# EAGLE board babylight (EAGLE 6.4)
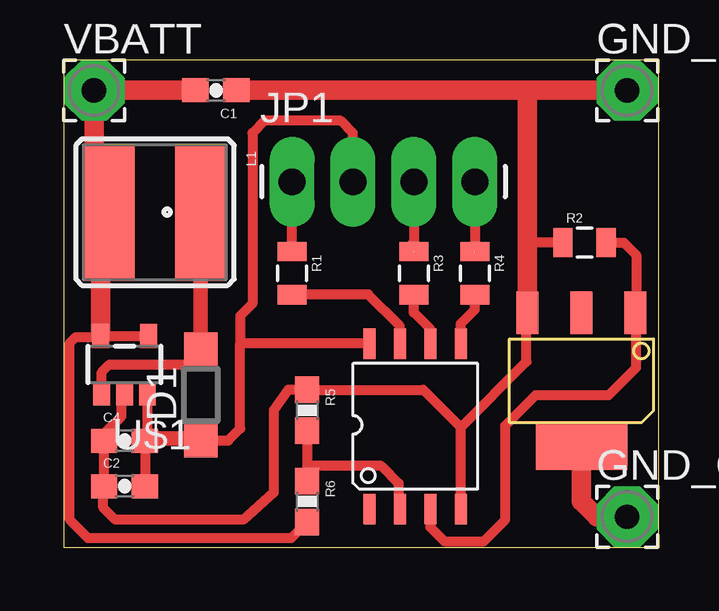
[diagram p0: board, top side]

Size 24.82 x 20.31 mm. Coordinates in mm from the lower left corner, seen from the top.
Outline: 0,0 24.82,0 24.82,20.31 0,20.31 0,0
Copper layers (1*16): Top 0.035mm / dielectric 1.5mm / Bottom 0.035mm
Design rules "default": minimum track width 10mil, minimum drill 24mil, track to track 8mil, track to pad 8mil, pad to pad 8mil, via to via 8mil, smd to smd 8mil, copper to edge 40mil, drill to drill 8mil, minimum pad ring 10mil, minimum via ring 8mil, stop-mask expansion 4mil, vias tented up to drill 0mil, thermal gap 10mil

## Footprints (pad centres in the part's own frame; a part is rotated, then mirrored left to right if it is on the bottom)
0603-CAP = smd 1.1 x 1: 1 -0.85,0; 2 0.85,0
SOD123 = smd 1.4 x 1.4: A 1.9,0; C -1.9,0
2,54/1,0 = drill 1.016 pad 2.54 octagon: 1 0,0
1X04_LONGPADS = drill 1.118 pad 1.88 long: 1 0,0; 2 2.54,0; 3 5.08,0; 4 7.62,0
CR54 = smd 5.5 x 2.15: P$1 0,1.92; P$2 0,-1.92
0805 = smd 0.8 x 1.2: 1 -0.9,0; 2 0.9,0
0603-RES = smd 1.1 x 1: 1 -0.85,0; 2 0.85,0
SOT23-5 = smd 0.7 x 1: 1 0.95,1.2; 2 0,1.2; 3 -0.95,1.2; 4 -1,-1.2; 5 1,-1.2
WSOIC-8 = smd 0.508 x 1.27: 1 -1.855,-3.486; 2 -0.585,-3.486; 3 0.685,-3.486; 4 1.955,-3.486; 5 1.955,3.413; 6 0.685,3.413; 7 -0.585,3.413; 8 -1.855,3.413
SOT-223 = smd 0.914 x 1.778: 1 -2.25,-2.8; 2 0,-2.8; 3 2.25,-2.8 | smd 3.81 x 1.93: 4 0,2.8

## Placement (x,y rotation side)
C1  22uF  [0603-CAP]  6.35,19.05 180 top
C2  22uF  [0603-CAP]  2.54,2.54 0 top
C4  1uF  [0603-CAP]  2.54,4.45 0 top
D1  MBR0520  [SOD123]  5.71,6.35 90 top
GND_IN  [2,54/1,0]  23.5,19.05 0 top
GND_OUT  [2,54/1,0]  23.5,1.27 0 top
JP1  [1X04_LONGPADS]  9.53,15.24 0 top
L1  22uH  [CR54]  3.81,13.97 270 top
R1  560  [0805]  9.53,11.43 270 top
R2  100K  [0805]  21.72,12.7 0 top
R3  270  [0805]  14.61,11.43 270 top
R4  270  [0805]  17.14,11.43 270 top
R5  150K  [0603-RES]  10.16,5.71 270 top
R6  68K  [0603-RES]  10.16,1.91 270 top
U$1  SP6641A  [SOT23-5]  2.54,7.62 180 top
U$2  ATTINY13  [WSOIC-8]  14.61,5.08 0 top
U$7  FQT13N06LTF  [SOT-223]  21.59,6.99 180 top
VBATT  [2,54/1,0]  1.27,19.05 0 top

## Library data of the parts
C1 C2 C4 L1 R1-R6 = SparkFun
D1 = diode
GND_IN GND_OUT VBATT = wirepad
JP1 = SparkFun-Connectors
U$1 = Sipex Custom
U$2 U$7 = Synapseware

## Nets
5V: C2.2 C4.2 D1.C JP1.2 U$1.3 U$2.8
BLU: JP1.4 R4.1
GND: C1.1 C2.1 C4.1 GND_IN.1 R2.1 R5.1 U$1.2 U$2.4 U$7.3
GND_OUT: GND_OUT.1 U$7.4
GRN: JP1.3 R3.1
N$1: R5.2 R6.1 U$2.2
N$3: D1.A L1.P$1 U$1.1
N$6: R4.2 U$2.5
N$7: R3.2 U$2.6
N$8: R1.2 U$2.7
RED: JP1.1 R1.1
SW: R2.2 U$2.3 U$7.1
VBATT: C1.2 L1.P$2 R6.2 U$1.4 U$1.5 VBATT.1

## Tracks (layer width: path | path; a pad name or v marks a point on that pad's centre or on a via)
5V
  Top 0.406: JP1.2 12.06,17.27 11.56,17.78 8.38,17.78 7.87,17.27 7.87,10.16 7.37,9.65 7.37,8.51 | 7.37,8.51 12.73,8.51 U$2.8 | U$1.3 3.49,4.54 C4.2 C2.2 | D1.C 6.86,4.45 7.37,4.95 7.37,8.51
  Top 0.61: 3.49,4.54 5.81,4.54 D1.C
BLU  (1 unrouted)
  Top 0.406: JP1.4 17.14,12.57 16.76,12.19 17.16,12.32
GND
  Top 0.406: U$2.4 16.56,5 | 16.56,5 19.3,7.75 19.3,9.75 U$7.3 | U$1.2 2.41,6.29 2.41,5.46 1.69,4.74 C4.1 C2.1 1.65,2.5 1.65,1.65 2.16,1.14 7.49,1.14 8.76,2.29 8.76,5.71 9.36,6.57 R5.1 15,6.57 16.56,5 | R2.1 19.47,12.7 19.34,12.57
  Top 0.813: C1.1 19.18,19.05 | 19.18,19.05 GND_IN.1 | U$7.3 19.34,12.57 19.34,18.89 19.18,19.05
GND_OUT
  Top 0.813: U$7.4 21.59,1.91 22.23,1.27 GND_OUT.1
GRN  (1 unrouted)
  Top 0.406: JP1.3 14.61,12.7 14.22,12.32 R3.1
N$1
  Top 0.406: U$2.2 13.97,1.64 13.97,2.67 13.25,3.39 10.33,3.39 10.16,3.56 | R5.2 10.16,3.56 | 10.16,3.56 R6.1
N$3
  Top 0.406: U$1.1 1.59,7.3 1.91,7.62 5.71,7.62 5.71,8.13 D1.A
  Top 0.61: D1.A 5.71,8.89 5.71,13.96 L1.P$1
N$6
  Top 0.406: U$2.5 16.56,9.32 17.14,9.91 R4.2
N$7
  Top 0.406: U$2.6 15.29,9.09 14.61,9.78 R3.2
N$8
  Top 0.406: U$2.7 14.02,9.22 12.7,10.54 12.08,10.54 R1.2
RED
  Top 0.406: R1.1 9.51,15.25 JP1.1
SW
  Top 0.406: U$2.3 15.29,0.84 15.88,0.25 17.53,0.25 18.41,1.14 18.41,5.08 19.68,6.35 22.73,6.35 23.88,7.49 23.88,9.75 U$7.1 23.88,9.82 23.88,12.19 23.37,12.7 R2.2
VBATT
  Top 0.406: U$1.4 U$1.5 1.48,8.76 0.51,8.76 0.25,8.51 0.25,1.14 1.02,0.38 9.49,0.38 R6.2
  Top 0.813: C1.2 VBATT.1 1.27,14.59 L1.P$2 | 2.17,13.69 L1.P$2 | U$1.5 1.54,13.62 L1.P$2